# EAGLE board adc (EAGLE 5.07)
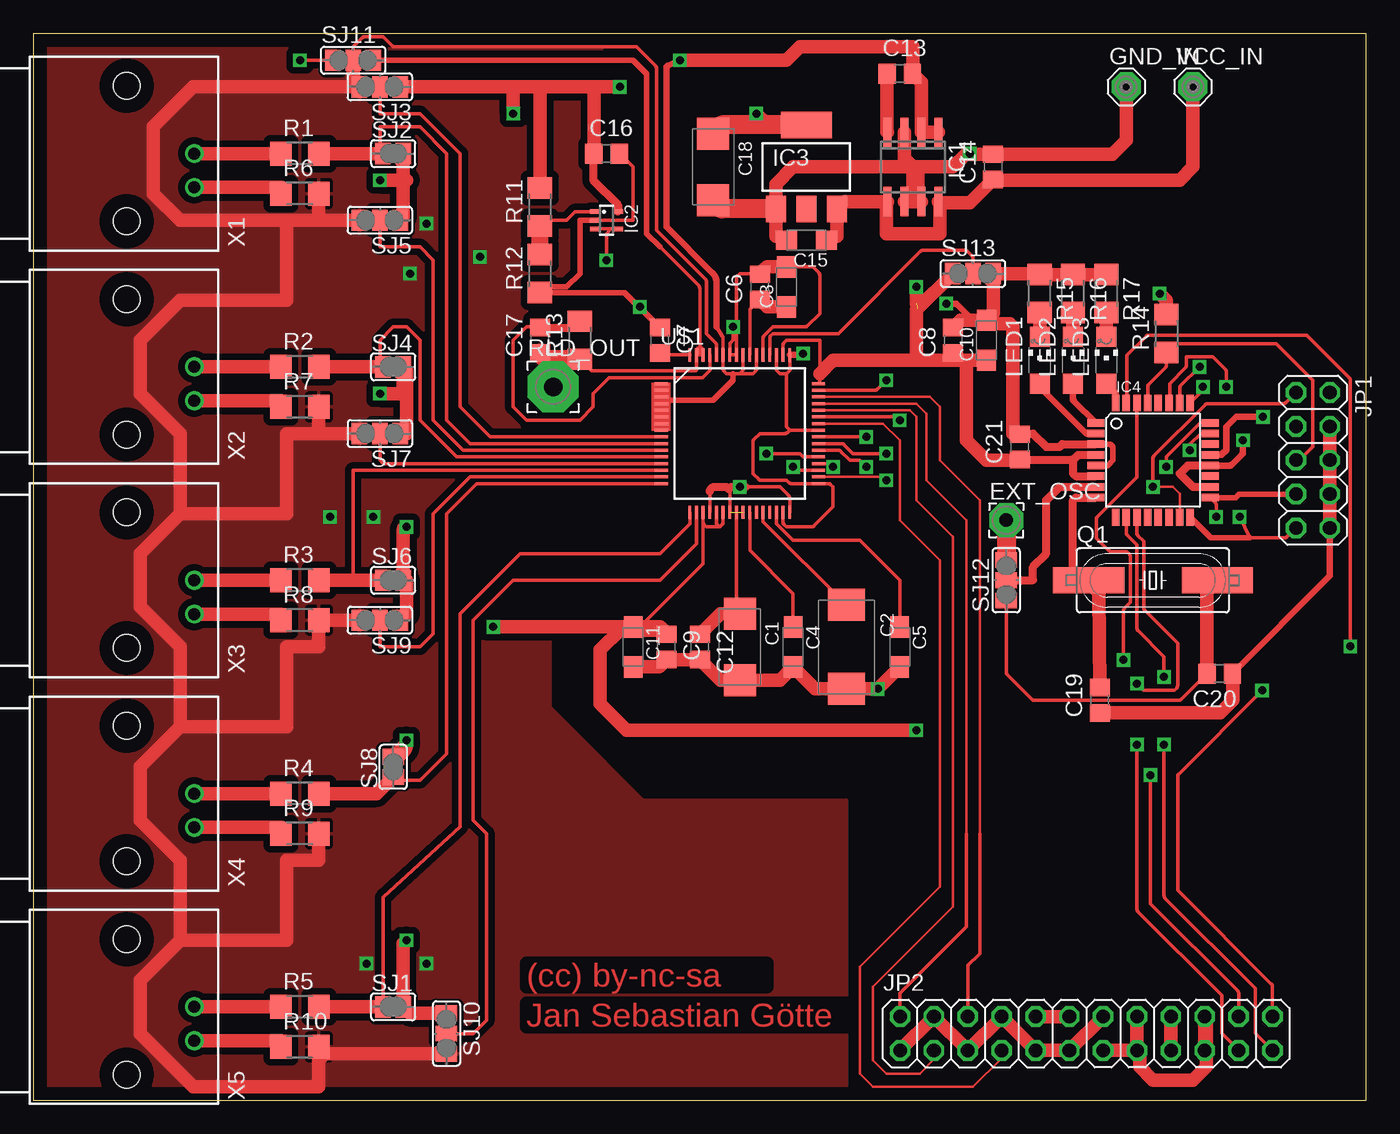
[diagram p0: board, top side]
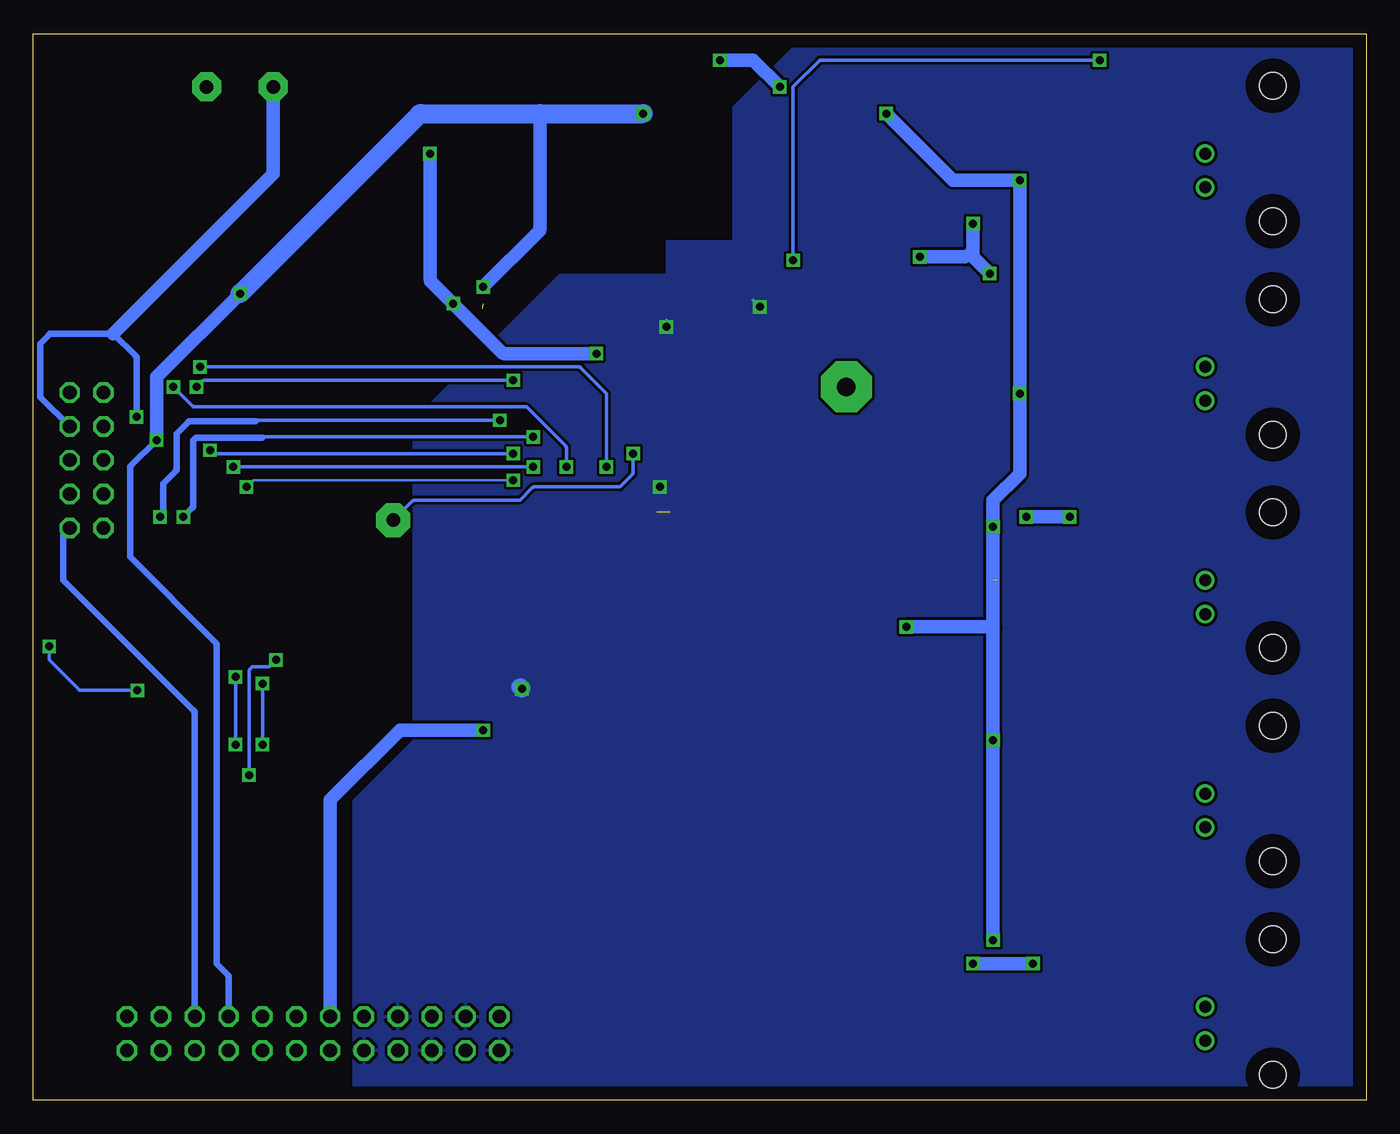
[diagram p1: board, bottom side, seen from below]

Size 100 x 80 mm. Coordinates in mm from the lower left corner, seen from the top.
Outline: 0,0 100,0 100,80 0,80 0,0
Copper layers (1*16): Top 0.035mm / dielectric 1.5mm / Bottom 0.035mm
Design rules "default": minimum track width 10mil, minimum drill 24mil, track to track 8mil, track to pad 8mil, pad to pad 8mil, via to via 8mil, smd to smd 8mil, copper to edge 40mil, drill to drill 8mil, minimum pad ring 10mil, minimum via ring 8mil, stop-mask expansion 4mil, vias tented up to drill 0mil, thermal gap 10mil

## Footprints (pad centres in the part's own frame; a part is rotated, then mirrored left to right if it is on the bottom)
SMC_C = smd 2.4 x 2.4: + -2.5,0; - 2.5,0
SMC_D = smd 2.4 x 2.8: + -3.15,0; - 3.15,0
SMC_A = smd 1.6 x 1.4: + -1.5,0; - 1.5,0
C0805 = smd 1.3 x 1.5: 1 -0.95,0; 2 0.95,0
2,54/1,0 = drill 1.016 pad 2.54 octagon: 1 0,0
MCS10B = drill 1.016 pad 2.159 octagon: MP 0,0
SOIC8 = smd 0.6 x 2.2: 1 -1.905,-2.6; 2 -0.635,-2.6; 3 0.635,-2.6; 4 1.905,-2.6; 5 1.905,2.6; 6 0.635,2.6; 7 -0.635,2.6; 8 -1.905,2.6
SC70-5L = smd 0.35 x 0.8: 1 -0.65,-0.85; 2 0,-0.85; 3 0.65,-0.85; 4 0.65,0.85; 5 -0.65,0.85
SOT223 = smd 1.5 x 2: 1 -2.3,-3.15; 2 0,-3.15; 3 2.3,-3.15 | smd 3.8 x 2: 4 0,3.15
TQFP32-08 = smd 1.27 x 0.559: 1 -4.293,2.8; 2 -4.293,2; 3 -4.293,1.2; 4 -4.293,0.4; 5 -4.293,-0.4; 6 -4.293,-1.2; 7 -4.293,-2; 8 -4.293,-2.8; 17 4.293,-2.8; 18 4.293,-2; 19 4.293,-1.2; 20 4.293,-0.4; 21 4.293,0.4; 22 4.293,1.2; 23 4.293,2; 24 4.293,2.8 | smd 0.559 x 1.27: 9 -2.8,-4.293; 10 -2,-4.293; 11 -1.2,-4.293; 12 -0.4,-4.293; 13 0.4,-4.293; 14 1.2,-4.293; 15 2,-4.293; 16 2.8,-4.293; 25 2.8,4.293; 26 2,4.293; 27 1.2,4.293; 28 0.4,4.293; 29 -0.4,4.293; 30 -1.2,4.293; 31 -2,4.293; 32 -2.8,4.293
2X05 = drill 1.016 octagon: 1 -5.08,-1.27; 2 -5.08,1.27; 3 -2.54,-1.27; 4 -2.54,1.27; 5 0,-1.27; 6 0,1.27; 7 2.54,-1.27; 8 2.54,1.27; 9 5.08,-1.27; 10 5.08,1.27
2X12 = drill 1.016 octagon: 1 -13.97,-1.27; 2 -13.97,1.27; 3 -11.43,-1.27; 4 -11.43,1.27; 5 -8.89,-1.27; 6 -8.89,1.27; 7 -6.35,-1.27; 8 -6.35,1.27; 9 -3.81,-1.27; 10 -3.81,1.27; 11 -1.27,-1.27; 12 -1.27,1.27; 13 1.27,-1.27; 14 1.27,1.27; 15 3.81,-1.27; 16 3.81,1.27; 17 6.35,-1.27; 18 6.35,1.27; 19 8.89,-1.27; 20 8.89,1.27; 21 11.43,-1.27; 22 11.43,1.27; 23 13.97,-1.27; 24 13.97,1.27
CHIPLED_1206 = smd 1.5 x 1.5: A 0,-1.75; C 0,1.75
HC49UP = smd 5.334 x 1.93: 1 -4.826,0; 2 4.826,0
R1206 = smd 1.6 x 1.803: 1 -1.422,0; 2 1.422,0
3,81/1,4 = drill 1.397 pad 3.81 octagon: 1 0,0
SJ = smd 1.168 x 1.6: 1 -0.762,0; 2 0.762,0
SJ_2 = smd 1.168 x 1.6: 1 -1.524,0; 2 0,0; 3 1.524,0
TQFP-64 = smd 1 x 0.22: 1 -5.9,3.75; 2 -5.9,3.25; 3 -5.9,2.75; 4 -5.9,2.25; 5 -5.9,1.75; 6 -5.9,1.25; 7 -5.9,0.75; 8 -5.9,0.25; 9 -5.9,-0.25; 10 -5.9,-0.75; 11 -5.9,-1.25; 12 -5.9,-1.75; 13 -5.9,-2.25; 14 -5.9,-2.75; 15 -5.9,-3.25; 16 -5.9,-3.75; 33 5.9,-3.75; 34 5.9,-3.25; 35 5.9,-2.75; 36 5.9,-2.25; 37 5.9,-1.75; 38 5.9,-1.25; 39 5.9,-0.75; 40 5.9,-0.25; 41 5.9,0.25; 42 5.9,0.75; 43 5.9,1.25; 44 5.9,1.75; 45 5.9,2.25; 46 5.9,2.75; 47 5.9,3.25; 48 5.9,3.75 | smd 0.22 x 1: 17 -3.75,-5.9; 18 -3.25,-5.9; 19 -2.75,-5.9; 20 -2.25,-5.9; 21 -1.75,-5.9; 22 -1.25,-5.9; 23 -0.75,-5.9; 24 -0.25,-5.9; 25 0.25,-5.9; 26 0.75,-5.9; 27 1.25,-5.9; 28 1.75,-5.9; 29 2.25,-5.9; 30 2.75,-5.9; 31 3.25,-5.9; 32 3.75,-5.9; 49 3.75,5.9; 50 3.25,5.9; 51 2.75,5.9; 52 2.25,5.9; 53 1.75,5.9; 54 1.25,5.9; 55 0.75,5.9; 56 0.25,5.9; 57 -0.25,5.9; 58 -0.75,5.9; 59 -1.25,5.9; 60 -1.75,5.9; 61 -2.25,5.9; 62 -2.75,5.9; 63 -3.25,5.9; 64 -3.75,5.9
AMP_227161 = drill 0.9 pad 1.27 round: 1 0,-5.08; 2 -2.54,-5.08 | hole 2: -5.08,0; 5.08,0

## Placement (x,y rotation side)
C1  10µ  [SMC_C]  53,34 270 top
C2  22µ  [SMC_D]  61,34 270 top
C3  1µ  [SMC_A]  56.5,61 90 top
C4  1µ  [SMC_A]  57,34 270 top
C5  1µ  [SMC_A]  65,34 270 top
C6  100n  [C0805]  54.5,61 90 top
C7  100p  [C0805]  47,57 270 top
C8  100n  [C0805]  69,57 90 top
C9  100n  [C0805]  47.5,34 270 top
C10  1µ  [SMC_A]  71.5,57 90 top
C11  1µ  [SMC_A]  45,34 270 top
C12  100n  [C0805]  50,34 270 top
C13  10n  [C0805]  65,77 0 top
C14  100n  [C0805]  72,70 90 top
C15  1µ  [SMC_A]  58,64.5 180 top
C16  100n  [C0805]  43,71 0 top
C17  10n  [C0805]  38,57 90 top
C18  10µ  [SMC_C]  51,70 270 top
C19  22p  [C0805]  80,30 90 top
C20  22p  [C0805]  89,32 180 top
C21  100n  [C0805]  74,49 90 top
EXT_OSC  [2,54/1,0]  73,43.5 0 top
GND_IN  MCS10B  [MCS10B]  82,76 0 top
IC1  LT1763CS8-5  [SOIC8]  66,70 180 top
IC2  LMV321M7  [SC70-5L]  43,66 270 top
IC3  LD117AS33TR  [SOT223]  58,70 0 top
IC4  MEGA8L  [TQFP32-08]  84,48 0 top
JP1  [2X05]  96,48 270 top
JP2  [2X12]  79,5 0 top
LED1  red  [CHIPLED_1206]  75.5,55.5 0 top
LED2  green  [CHIPLED_1206]  78,55.5 0 top
LED3  green  [CHIPLED_1206]  80.5,55.5 0 top
Q1  16MHz  [HC49UP]  84,39 0 top
R1  100k  [R1206]  20,71 0 top
R2  100k  [R1206]  20,55 0 top
R3  100k  [R1206]  20,39 0 top
R4  100k  [R1206]  20,23 0 top
R5  100k  [R1206]  20,7 0 top
R6  100k  [R1206]  20,68 0 top
R7  100k  [R1206]  20,52 0 top
R8  100k  [R1206]  20,36 0 top
R9  100k  [R1206]  20,20 0 top
R10  100k  [R1206]  20,4 0 top
R11  20k  [R1206]  38,67 90 top
R12  20k  [R1206]  38,62 90 top
R13  390k  [R1206]  41,57 90 top
R14  100k  [R1206]  85,57.5 90 top
R15  160  [R1206]  75.5,60.5 270 top
R16  120  [R1206]  78,60.5 270 top
R17  120  [R1206]  80.5,60.5 270 top
RLD_OUT  [3,81/1,4]  39,53.5 0 top
SJ1  [SJ]  27,7 0 top
SJ2  [SJ]  27,71 0 top
SJ3  [SJ_2]  26,76 180 top
SJ4  [SJ]  27,55 0 top
SJ5  [SJ_2]  26,66 180 top
SJ6  [SJ]  27,39 0 top
SJ7  [SJ_2]  26,50 180 top
SJ8  [SJ]  27,25 90 top
SJ9  [SJ_2]  26,36 180 top
SJ10  [SJ_2]  31,5 270 top
SJ11  [SJ_2]  24,78 0 top
SJ12  [SJ_2]  73,39 90 top
SJ13  [SJ_2]  70.5,62 0 top
U$1  ADS1194  [TQFP-64]  53,50 0 top
VCC_IN  MCS10B  [MCS10B]  87,76 0 top
X1  1-227161-0  [AMP_227161]  7,71 90 top
X2  1-227161-0  [AMP_227161]  7,55 90 top
X3  1-227161-0  [AMP_227161]  7,39 90 top
X4  1-227161-0  [AMP_227161]  7,23 90 top
X5  1-227161-0  [AMP_227161]  7,7 90 top

## Library data of the parts
C1-C21 R1-R17 = rcl
EXT_OSC RLD_OUT = wirepad
GND_IN VCC_IN = solpad
IC1 = linear-technology
IC2 = linear
IC3 = v-reg
IC4 = atmel
JP1 JP2 = pinhead
LED1-LED3 = led
Q1 = crystal
SJ1-SJ13 = jumper
U$1 = mytexas
X1-X5 = con-coax

## Nets
!DRDY: IC4.25 U$1.47
!PWDN: IC4.26 U$1.35
!RESET: IC4.27 U$1.36
CS1: IC4.23 U$1.39
GND: C8.2 C10.- C14.2 C15.- C18.- C19.1 C20.1 C21.2 GND_IN.MP IC1.3 IC1.6 IC1.7 IC3.1 IC4.3 IC4.5 IC4.21 JP1.4 JP1.6 JP1.8 JP1.10 JP2.13 JP2.15 JP2.16 JP2.19 JP2.20 R15.1 R16.1 R17.1 SJ13.3 U$1.31 U$1.33 U$1.41 U$1.49 U$1.51
MISO: IC4.16 JP1.9 U$1.43
MOSI: IC4.15 JP1.1 U$1.34
N$1: C2.+ U$1.28
N$2: C4.+ U$1.26
N$3: C7.2 U$1.64
N$4: C5.+ U$1.30
N$5: C3.+ C6.1 U$1.55
N$6: C1.+ C12.1 U$1.24
N$7: IC2.1 R11.1 R12.2
N$8: R1.2 SJ2.1 U$1.10
N$10: R2.2 SJ4.1 U$1.12
N$11: C14.1 C15.+ IC1.5 IC1.8 IC3.3 VCC_IN.MP
N$12: R3.2 SJ6.1 U$1.14
N$13: R6.2 R7.2 R8.2 R9.2 R10.2 SJ3.3 SJ5.3 SJ7.3 SJ9.3 SJ10.3 SJ11.2 U$1.60
N$14: R4.2 SJ8.1 U$1.16
N$15: R5.2 SJ1.1 U$1.17
N$16: C13.1 IC1.4
N$17: R1.1 X1.1
N$18: R2.1 X2.1
N$19: R3.1 X3.1
N$20: R4.1 X4.1
N$21: R5.1 X5.1
N$22: SJ10.2 U$1.18
N$23: SJ9.2 U$1.15
N$24: SJ7.2 U$1.13
N$25: SJ5.2 U$1.11
N$26: SJ3.2 U$1.9
N$27: R10.1 X5.2
N$28: R9.1 X4.2
N$29: R8.1 X3.2
N$30: R7.1 X2.2
N$31: R6.1 X1.2
N$32: IC2.3 IC2.4 SJ11.1
N$33: C17.1 R13.1 RLD_OUT.1 SJ11.3 U$1.62 U$1.63
N$34: C17.2 R13.2 U$1.61
N$35: C20.2 Q1.2 SJ12.1
N$36: EXT_OSC.1 SJ12.3 U$1.37
N$37: IC4.29 JP1.5 R14.1
N$38: C19.2 IC4.8 Q1.1
N$39: SJ13.2 U$1.52
N$40: IC4.7 SJ12.2
N$41: IC4.32 LED3.A
N$42: IC4.1 LED2.A
N$43: IC4.2 LED1.A
N$44: LED1.C R15.2
N$45: LED2.C R16.2
N$46: LED3.C R17.2
N$48: JP2.2 U$1.45
N$49: JP2.7 U$1.42
N$50: C9.1 C11.+ C13.2 C16.1 IC1.1 IC1.2 IC2.5 JP2.10 JP2.12 R11.2 SJ1.2 SJ2.2 SJ3.1 SJ4.2 SJ5.1 SJ6.2 SJ7.1 SJ8.2 SJ9.1 SJ10.1 U$1.19 U$1.21 U$1.22 U$1.54 U$1.56 U$1.59
N$51: JP2.6 U$1.46
N$52: JP2.3 U$1.44
N$53: C8.1 C10.+ C18.+ C21.1 IC3.4 IC4.4 IC4.6 IC4.18 IC4.20 JP2.17 JP2.18 R14.2 SJ13.1 U$1.48 U$1.50
PD0: IC4.30 JP2.22
PD1: IC4.31 JP2.24
PD6: IC4.10 JP2.23
PD7: IC4.11 JP2.21
SCLK: IC4.17 JP1.7 U$1.40
START: IC4.24 U$1.38
VSS: C1.- C2.- C3.- C4.- C5.- C6.2 C7.1 C9.2 C11.- C12.2 C16.2 IC2.2 JP2.1 JP2.4 JP2.5 JP2.8 JP2.9 JP2.11 JP2.14 R12.1 U$1.20 U$1.23 U$1.25 U$1.32 U$1.53 U$1.57 U$1.58

## Tracks (layer width: path | path; a pad name or v marks a point on that pad's centre or on a via)
!DRDY  (via drill 0.6)
  Top 0.254: U$1.47 63.15,53.25 arc45 63.32,53.32 v64,54 | v87.75,53.5 87.75,53.35 arc-45 87.68,53.17 IC4.25
  Bottom 0.254: v64,54 87.14,54 arc-45 87.32,53.93 v87.75,53.5
!PWDN  (via drill 0.6)
  Top 0.254: 86,52.25 IC4.26 86,53.4 arc-45 86.07,53.57 v87.5,55 | v57,47.5 57.18,47.32 arc45 57.35,47.25 U$1.35
  Bottom 0.254: v87.5,55 59.1,55 arc45 58.93,54.93 57,53 v57,47.5
!RESET  (via drill 0.6)
  Top 0.254: U$1.36 59.65,47.75 arc-45 59.82,47.68 v60,47.5 | v89.5,53.5 89.5,54.65 arc45 89.43,54.82 88.5,55.75 86.5,55.75 86.5,55.1 arc-45 86.43,54.93 85.25,53.75 85.25,52.41 arc-45 IC4.27
  Bottom 0.254: v60,47.5 60,48.9 arc-45 60.07,49.07 63,52 87.89,52 arc45 88.07,52.07 v89.5,53.5
CS1  (via drill 0.6)
  Top 0.254: U$1.39 60.65,49.25 arc-45 60.82,49.18 61.5,48.5 v64,48.5 | IC4.23 87.61,50 86.82,49.22 arc45 86.75,49.04 v86.75,48.75
  Bottom 0.254: v86.75,48.75 86.57,48.57 arc-45 86.39,48.5 v64,48.5
GND  (via drill 0.6)
  Top 0.254: U$1.49 56.75,54.75 56.5,54.5 | U$1.51 55.75,54.75 56,54.5 56.5,54.5 | 56.75,50.25 U$1.41 56.85,50.25 | 56.75,50.25 56.5,50.5 56.5,54.5 | 88,3.5 88,2.5 87.07,1.57 arc-45 86.89,1.5 84,1.5 82.88,2.62 arc-45 82.81,2.79 JP2.15 | U$1.31 56.25,43.35 arc45 56.32,43.18 56.5,43 58.4,43 arc45 58.57,43.07 60,44.5 60,46 59.82,46.18 arc45 59.65,46.25 U$1.33 56.85,46.25 arc-45 56.68,46.32 56.5,46.5 54.6,46.5 arc-45 54.43,46.57 54,47 54,49.4 arc-45 54.07,49.57 54.5,50 56.4,50 arc45 56.57,50.07 56.75,50.25
  Top 0.406: IC4.3 80.8,49.2 81,49 81,48 80.6,47.6 IC4.5
  Top 0.5: U$1.49 57.55,55.9 arc45 57.72,55.97 v57.75,56 | v68.5,59.75 69.14,59.75 arc-45 69.32,59.68 70.5,58.5 | IC1.7 66.64,69.53 arc-45 66.71,69.71 67,70 69.14,70 arc45 69.32,70.07 v70.25,71 | IC4.21 89.05,48.4 arc45 89.22,48.47 89.5,48.75 89.5,50.4 arc-45 89.57,50.57 90.25,51.25 v92.25,51.25 | JP1.10 97.27,39.42 arc-45 97.2,39.25 C20.1
  Top 0.61: IC4.3 77.2,49.2 77,49 76,49 75,50 74.05,50 C21.2
  Top 1.016: C15.- 55.7,64.8 IC3.1 55.7,68.7 57,70 66,70 | 66,67.4 IC1.6 | 66,67.4 IC1.7 | GND_IN.MP 82,72 80.95,70.95 C14.2 69.95,70.95 69,70 67,70 66,70 | 66,70 66,67.4 | IC1.3 65.36,70.64 66,70 | JP1.10 JP1.8 JP1.6 JP1.4 | JP2.13 JP2.15 JP2.16 | JP2.19 JP2.20 87.93,6.23 arc-45 88,6.05 88,3.5 | C20.1 arc-45 90,31.88 90,30 89.12,29.12 arc-45 88.94,29.05 C19.1 | R17.1 R16.1 R15.1 R15.1 arc45 75.32,62 SJ13.3 72.02,59.13 arc-45 71.95,58.95 C10.- | C10.- 70.5,58.5 69.66,58.5 arc45 69.48,58.43 C8.2 | C10.- 71.68,58.32 arc45 71.86,58.25 73.25,58.25 73.43,58.07 arc-45 73.5,57.9 73.5,50 arc45 73.62,49.95 C21.2
  Top 1.422: C18.- 51.65,66.85 IC3.1
  Bottom 0.5: 64.82,56.07 arc-45 64.64,56 | 70.25,61.6 arc-45 70.18,61.43 | v92.25,51.25 92.25,55.65 arc-45 92.32,55.82 94,57.5 98.64,57.5 arc-45 98.82,57.43 99.5,56.75 99.5,52.88 arc-45 99.43,52.7 JP1.4 | JP2.20 87.89,29.04 arc-45 87.96,29.21 97.75,39 97.75,42.34 arc45 97.68,42.51 JP1.10
  Bottom 1.016: 64.64,56 v57.75,56 | 64.82,56.07 v68.5,59.75 70.18,61.43 | v70.25,71 70.25,61.6 | 94,57.5 82.07,69.43 arc-45 82,69.61 GND_IN.MP
MISO  (via drill 0.6)
  Top 0.254: U$1.43 64.64,51.25 arc-45 64.82,51.18 v65,51 | v90.5,43.75 91.25,42.17 93.88,42.17 arc45 94.05,42.24 JP1.9
  Top 0.406: 91.25,42.17 88.34,42.17 IC4.16
  Bottom 0.254: v65,51 83.14,51 arc-45 83.32,50.93
  Bottom 0.5: 83.32,50.93 88.22,50.93 arc-45 88.4,50.85 89.25,50 89.25,47.35 arc45 89.32,47.18 90.25,46.25 90.25,44.1 arc45 90.32,43.93 v90.5,43.75
MOSI  (via drill 0.6)
  Top 0.2: U$1.34 63.75,46.75 v64,46.5 | v84,46 85.5,46 86,45.5 IC4.15
  Top 0.254: JP1.1 93.97,52.32 arc-45 93.8,52.25 88.11,52.25 arc45 87.93,52.18 84.07,48.32 arc45 84,48.15 v84,46
  Bottom 0.2: v64,46.5 83.39,46.5 arc-45 83.57,46.43 v84,46
N$1
  Top 0.254: U$1.28 54.75,43.4 C2.+
N$2
  Top 0.254: U$1.26 53.75,41.25 57,38 C4.+
N$3
  Top 0.254: C7.2 47.15,55.9 U$1.64
N$4
  Top 0.254: U$1.30 55.75,43.25 57,42 62,42 65,39 C5.+
N$5
  Top 0.254: U$1.55 53.75,59.2 arc-45 53.82,59.37 C6.1
  Top 1.016: C3.+ 55.16,59.5 arc-45 54.98,59.57 C6.1
N$6
  Top 0.254: U$1.24 52.75,36.5 C1.+
  Top 1.016: C12.1 51.55,36.5 C1.+
N$7
  Top 0.254: IC2.1 40.65,66.65 40,66 38.42,66 R11.1
  Top 1.27: R12.2 R11.1
N$8
  Top 0.254: SJ2.1 26,71.24 26,73 29,73 31,71 31,51 32.75,49.25 U$1.10
  Top 1.016: SJ2.1 R1.2
N$9
  Top 0.254: 43,65 43,64
N$10
  Top 0.254: U$1.12 31.75,48.25 29,51 29,57 28,58 27,58 26,57 26,55
  Top 1.016: R2.2 26,55 SJ4.1
N$11
  Top 1.016: C15.+ 60.3,64.8 IC3.3 60.85,67.4 IC1.5 64,67.4 64,65 68,65 68,67.31 | VCC_IN.MP 87,70 86,69 72.05,69 C14.1 70.25,67.31 68,67.31 | 68,67.31 IC1.8
N$12
  Top 0.254: U$1.14 24,47.25 24,39
  Top 1.016: R3.2 24,39 SJ6.1
N$13  (via drill 0.6)
  Top 0.254: U$1.60 51.25,56.65 arc45 51.18,56.82 50.5,57.5 50.5,61.4 arc45 50.43,61.57 46.75,65.25 46.75,77.39 arc45 46.68,77.57 45.25,79 27.11,79 arc-45 26.93,79.07 26.25,79.75 24.86,79.75 arc45 24.68,79.68 24.07,79.07 arc45 24,78.89 SJ11.2
  Top 1.016: 21.42,3 21.42,1 12,1 8,5 8,9 11,12 | 21.42,3 R10.2 | 11,12 19,12 19,18 21.42,18 R9.2 | 11,12 11,18 8,21 8,25 11,28 | 11,28 11,34 8,37 8,41 11,44 | 11,44 11,50 8,53 8,57 11,60 19,60 19,66 | 11,28 19,28 19,34 21.42,34 R8.2 SJ9.3 | 11,44 19,44 19,50 21.42,50 | 21.42,50 R7.2 | 21.42,66 R6.2 | 19,66 21.42,66 | 21.42,66 SJ5.3 | 21.42,50 SJ7.3 | SJ10.3 21.9,3.48 21.42,3 | 19,66 11,66 9,68 9,73 12,76 SJ3.3 24,76.48 SJ11.2
  Bottom 0.5: 29.43,63.18 arc45 29.5,63.35 | 29.75,63.5 29.93,63.32 arc45 30.11,63.25
  Bottom 1.016: v28.25,62 29.43,63.18 | v29.5,65.75 29.5,63.35 29.57,63.43 arc-45 29.75,63.5 | 30.11,63.25 v33.5,63.25 | v25,10.25 v29.5,10.25 | v22.25,43.75 v25.5,43.75
  pour Top (isolate 0.5): 0.25,80 0.07,79.82 arc45 0,79.64 0,0 61,0 61,22.5 45.75,22.5 38.82,29.43 arc-45 38.75,29.61 38.75,37.25 48.75,37.25 51.43,39.93 arc45 51.5,40.11 51.5,43.75 59,43.75 59,56.5 58.82,56.32 arc-45 58.64,56.25 48.5,56.25 48.32,56.43 arc-45 48.25,56.61 48.25,73.25 41.57,79.93 arc45 41.39,80
N$14
  Top 0.254: U$1.16 33.25,46.25 31,44 31,26 29,24 27.24,24 SJ8.1
  Top 1.016: R4.2 25.76,23 SJ8.1
N$15
  Top 0.254: SJ1.1 26.24,15.24 32,20.5 32,36.5 36.5,41 47,41 49.25,43.25 U$1.17
  Top 1.016: R5.2 SJ1.1
N$16
  Top 1.016: C13.1 64.05,72.64 IC1.4
N$17
  Top 1.016: X1.1 R1.1
N$18
  Top 1.016: X2.1 R2.1
N$19
  Top 1.016: X3.1 R3.1
N$20
  Top 1.016: X4.1 R4.1
N$21
  Top 1.016: X5.1 R5.1
N$22
  Top 0.254: SJ10.2 33,5 34,6 34,20 33,21 33,36 36,39 47,39 49.75,41.75 U$1.18
N$23
  Top 0.254: U$1.15 32.75,46.75 30,44 30,35 29,34 26,34 SJ9.2
N$24
  Top 0.254: U$1.13 26.25,47.75 26,48 SJ7.2
N$25
  Top 0.254: U$1.11 32.25,48.75 30,51 30,63 29,64 26,64 SJ5.2
N$26
  Top 0.254: SJ3.2 26,74 29,74 32,71 32,52 34.25,49.75 U$1.9
N$27
  Top 1.016: X5.2 18.58,4.46 R10.1
N$28
  Top 1.016: X4.2 18.58,20.46 R9.1
N$29
  Top 1.016: X3.2 18.58,36.46 R8.1
N$30
  Top 1.016: X2.2 18.58,52.46 R7.1
N$31
  Top 1.016: X1.2 18.58,68.46 R6.1
N$32  (via drill 0.6)
  Top 0.254: IC2.3 IC2.4 43.35,65.35 43,65 v43,63 | v20,78 SJ11.1
  Bottom 0.254: v20,78 41,78 43,76 v43,63
N$33
  Top 0.254: U$1.63 U$1.62 | U$1.63 49.9,55.9 50,56 50,60.9 arc45 49.93,61.07 47,64 | 41.08,55.5 R13.1 41.88,54.7 49.7,54.7 49.75,54.75 U$1.63
  Top 0.406: SJ11.3 45,78 46,77 46,65 47,64
  Top 0.61: 38.47,55.58 39,55.05 RLD_OUT.1
  Top 1.422: C17.1 38.47,55.58 R13.1
N$34
  Top 0.254: U$1.61 50.75,54.75 50.2,54.2 43.2,54.2 42,53 42,52 41,51 37,51 36,52 36,57 37,58 37.95,58 C17.2
  Top 0.61: R13.2 40.53,57.95 C17.2
N$35
  Top 0.254: SJ12.1 73,32.1 arc45 73.07,31.93 75,30 85.94,30 arc45 86.12,30.07 C20.2
  Top 1.016: Q1.2 88.12,38.3 arc45 88.05,38.12 C20.2
N$36  (via drill 0.6)
  Top 0.254: U$1.37 57.85,48.25 arc-45 57.68,48.32 57.5,48.5 v55,48.5
  Top 1.422: SJ12.3 73.02,42.5 EXT_OSC.1
  Bottom 0.254: v55,48.5 55,47.1 arc45 55.07,46.93 56,46 62.4,46 arc-45 62.57,45.93 63.5,45 71.39,45 arc-45 71.57,44.93 EXT_OSC.1
N$37
  Top 0.254: JP1.5 94.89,48 arc45 95.07,48.07 96,49 96,54 93.25,56.75 85.78,56.75 arc45 85.6,56.68 R14.1 85,55.1 arc-45 84.93,54.93 83.67,53.67 arc45 83.6,53.49 IC4.29
N$38
  Top 0.61: IC4.8 78.2,45.2 78,45 78,39 Q1.1
  Top 1.016: C19.2 79.95,38.05 79,39 Q1.1
N$39
  Top 0.254: U$1.52 55.25,57.15 arc-45 55.32,57.32 55.5,57.5 60.4,57.5 66.57,63.68 arc-45 66.75,63.75 70,63.75 70.43,63.32 arc-45 70.5,63.15 SJ13.2
N$40
  Top 0.61: SJ12.2 75,39 75,40 76,41 76,45 77,46 IC4.7
N$41
  Top 0.5: IC4.32 81.2,52.95 arc45 81.13,53.12 LED3.A
N$42
  Top 0.5: LED2.A 78,52.61 arc45 78.07,52.43 IC4.1
N$43
  Top 0.5: IC4.2 79.11,50 arc-45 78.93,50.07 75.57,53.43 arc-45 75.5,53.6 LED1.A
N$44
  Top 1.016: LED1.C R15.2
N$45
  Top 1.016: LED2.C R16.2
N$46
  Top 1.016: LED3.C R17.2
N$47
  Top 1.016: 83,3.5 83,2.5 83.93,1.57 arc45 84.11,1.5 87,1.5 87.93,2.43 arc45 88,2.6 88,4
N$48
  Top 0.2: 70,20 70,43.5 67,46.5 67,51.5 66.25,52.25 U$1.45
  Top 0.254: JP2.2 65.03,8.03 70,13 70,20
N$49
  Top 0.2: JP2.7 72.65,3.15 70.5,1 63,1 62,2 62,10 68,16 68,40.5 65,43.5 65,49.5 63.75,50.75 U$1.42
N$50  (via drill 0.6)  (1 unrouted)
  Top 0.254: 45.5,35.5 50.18,40.18 arc45 50.25,40.35 U$1.19 50.25,43.35 arc45 50.32,43.18 50.5,43 51.4,43 arc45 51.57,43.07 | U$1.22 51.75,43.35 arc-45 51.68,43.18 51.57,43.07 | 51.57,43.07 51.5,43 51.32,43.18 arc-45 51.25,43.35 U$1.21 | 51.75,54.85 arc45 51.82,54.68 | U$1.56 53.25,54.85 arc-45 53.18,54.68 53,54.5 | 53,54.5 52.5,54.5 52,54.5 51.82,54.68 | 51.75,54.85 U$1.59 51.75,57.15 arc45 51.68,57.32 51.25,58 | 51.75,54.85 arc45 51.82,54.68 | 53,54.5 54,54.5 54.18,54.68 arc45 54.25,54.85 U$1.54
  Top 0.406: 47.5,52.5 51,52.5 52.43,53.93 arc45 52.5,54.1 52.5,54.5
  Top 0.5: 51.25,58 51.25,61.4 arc45 50.93,62.07 47.5,65.5 47.5,77.39 arc-45 47.57,77.57 v48.5,78
  Top 0.61: IC2.5 43.85,67.15 42,69 42,71.95 42.05,72
  Top 1.016: SJ10.1 28.24,6.52 SJ1.2 27.76,11.76 v28,12 | SJ9.1 28,36.48 28,39 | 28,53 28,50 SJ7.1 | 28,53 28,54.76 SJ4.2 27.76,53.24 28,53 | SJ5.1 27.76,66.24 27.76,69 | 27.76,69 SJ2.2 27.76,69.24 28,69 v26,69 27.76,69 | 36,76 SJ3.1 | 36,76 38,76 | 38,76 42.05,76 | 42.05,76 42.05,72 C16.1 | 38,76 R11.2 | 28,26.76 SJ8.2 arc90 28,26.76 | v28,27 28,26.76 | v28,43 arc90 27.76,42.76 SJ6.2 | v26,53 28,53 | v36,74 36,76 | IC1.2 IC1.1 | IC1.2 66.64,76.31 C13.2 | IC1.2 66.64,76.36 66,77 66,79 57.5,79 56.57,78.07 arc-45 56.4,78 v48.5,78 | 42.05,76 v44,76 | C9.1 46.95,35.5 45.5,35.5 C11.+ | JP2.12 JP2.10 | C9.1 arc45 47.47,35.03 47,35.5 v34.5,35.5 | C9.1 47.27,35.18 arc45 47.09,35.25 44,35.25 42.57,33.82 arc45 42.5,33.65 42.5,29.75 44.43,27.82 arc45 44.6,27.75 v66.25,27.75
  Bottom 1.016: v28,12 v28,27 28,35.5 | 28,35.5 v28,43 28,45 26,47 v26,53 v26,69 31,69 v36,74 | v48.5,78 46,78 v44,76 | 28,35.5 v34.5,35.5 | v66.25,27.75 72.5,27.75 77.66,22.59 arc-45 77.73,22.41 JP2.12
N$51
  Top 0.2: 71,20 71,45 68,48 68,52 67.25,52.75 U$1.46
  Top 0.254: JP2.6 70.11,10.11 71,11 71,20
N$52
  Top 0.2: JP2.3 67.57,3.07 66.5,2 64,2 63,3 63,8.5 69,14.5 69,42.25 66.25,45 66.25,51.25 65.75,51.75 U$1.44
N$53  (via drill 0.6)  (1 unrouted)
  Top 0.254: U$1.50 56.25,56.65 arc-45 56.32,56.82 56.5,57 59,57 59,54.5 59,53.95 arc-45 58.93,53.78 U$1.48
  Top 0.5: v90.75,49.5 90.75,48.6 arc-45 90.68,48.43 89.92,47.67 arc-45 89.75,47.6 IC4.20
  Top 0.61: IC4.20 86.6,47.6 86,47 87,46 IC4.18 | IC4.6 78.2,46.8 78,47 78,48 | IC4.4 78.4,48.4 78,48 | C21.1 77.95,48.05 78,48
  Top 1.016: v66.25,61 66.25,59.75 | JP2.17 JP2.18 | 69,55.5 70,55.5 | 70,55.5 C10.+ | 69,55.5 C8.1 | 66.25,55.5 60.1,55.5 arc45 59.93,55.43 59,54.5 | 66.25,55.5 69,55.5 | SJ13.1 66.32,59.35 arc45 66.25,59.17 66.25,55.5 | C21.1 arc-45 73.88,48 71.5,48 70.07,49.43 arc-45 70,49.6 70,55.5 | IC3.4 55.2,73.15 arc-45 55.03,73.22 v54.25,74 | R14.2 85,59.9 arc45 84.93,60.07 v84.5,60.5
  Top 1.422: IC3.4 51.65,73.15 C18.+
  Bottom 0.5: v90.75,49.5 92.68,47.57 arc-45 92.75,47.4 92.75,40.75 86.32,34.32 arc45 86.25,34.15 86.25,10.25 85.42,9.42 arc45 85.35,9.24 JP2.18
  Bottom 1.016: v84.5,60.5 90.68,54.32 arc-45 90.75,54.15 v90.75,49.5 | v66.25,61 62.07,65.18 arc-45 62,65.36 62,74
  Bottom 1.422: v54.25,74 62,74 70.89,74 arc-45 71.07,73.93 v84.5,60.5
PD0  (via drill 0.6)
  Top 0.254: JP2.22 90.43,8.02 arc45 90.36,8.2 83.82,14.73 v83.82,24.38 | v81.79,33.02 81.79,36.73 arc-45 81.86,36.9 82.3,37.34 82.3,40.79 arc45 82.22,40.97 82.04,41.15 80.88,41.15 arc-45 80.7,41.22 79.76,42.16 79.76,43.58 arc-45 79.83,43.76 82.73,46.66 arc45 82.8,46.84 IC4.30
  Bottom 0.254: v83.82,24.38 83.82,32.15 arc45 83.75,32.33 83.57,32.51 82.4,32.51 arc-45 82.22,32.59 v81.79,33.02
PD1  (via drill 0.6)
  Top 0.254: JP2.24 92.97,8.53 arc45 92.9,8.7 85.85,15.75 85.85,24.28 arc-45 85.93,24.46 v92.2,30.73 | v98.81,34.04 98.81,54 arc45 98.73,54.18 95.83,57.08 95.6,57.31 | 95.6,57.31 95.53,57.38 | IC4.31 arc45 82.04,52.39 82.04,55.86 83.49,57.31 arc-45 83.67,57.38 95.42,57.38 arc-45 95.6,57.31
  Bottom 0.254: v92.2,30.73 96.42,30.73 arc45 96.59,30.81 98.81,33.02 v98.81,34.04
PD6  (via drill 0.6)
  Top 0.254: JP2.23 91.77,4.93 arc-45 91.69,5.11 91.69,8.38 84.91,15.17 arc-45 84.84,15.35 v84.84,26.67 | v84.84,31.75 84.84,33.27 82.88,35.23 arc-45 82.8,35.41 82.8,41.66 82.07,42.39 arc-45 82,42.56 IC4.10
  Bottom 0.254: v84.84,26.67 v84.84,31.75
PD7  (via drill 0.6)
  Top 0.254: JP2.21 89.23,4.93 arc-45 89.15,5.11 89.15,7.87 82.88,14.15 arc-45 82.8,14.33 v82.8,26.67 | 82.8,43.7 arc45 IC4.11 82.8,42.53 arc45 82.87,42.35 83.31,41.91 83.31,36.94 arc45 83.39,36.76 85.85,34.29 85.85,31.09 arc-45 85.78,30.91 85.6,30.73 83.42,30.73 arc-45 83.24,30.81 v82.8,31.24
  Bottom 0.254: v82.8,26.67 v82.8,31.24
SCLK  (via drill 0.6)
  Top 0.254: U$1.40 v62.5,49.75 | v88.75,43.75 88.75,44.64 arc45 88.68,44.82 IC4.17
  Top 0.406: JP1.7 90.46,45.46 90.2,45.2 IC4.17
  Bottom 0.254: v62.5,49.75 82.64,49.75 arc-45 82.82,49.68
  Bottom 0.5: 82.82,49.68 87.72,49.68 arc-45 87.9,49.6 88,49.5 88,44.6 arc45 88.07,44.43 v88.75,43.75
START  (via drill 0.6)
  Top 0.254: U$1.38 60.4,48.75 arc-45 60.57,48.68 61.25,48 61.9,48 arc-45 62.07,47.93 v62.5,47.5 | IC4.24 87.66,50.8 arc45 87.48,50.73 85,48.25 v85,47.5
  Bottom 0.254: v62.5,47.5 84.5,47.5 v85,47.5
VSS  (via drill 0.6)  (1 unrouted)
  Top 0.254: C16.2 44,71 45,70 45,66 IC2.2 | U$1.20 50.75,45.65 | U$1.23 52.25,45.65 arc45 52.18,45.82 52.28,45.93 | 53.25,45.65 arc45 53.18,45.82 53.28,45.93 | U$1.53 54.75,57.15 arc-45 54.82,57.32 55.5,58 57.9,58 arc45 58.07,58.07 59,59 59,61.9 arc45 58.93,62.07 58.5,62.5 56,62.5 | C6.2 arc45 54.38,62 53,62 52.82,61.82 arc45 52.75,61.65 U$1.57 U$1.58 52.25,56.65 arc-45 52.32,56.82 52.5,57 v52.5,58 | C7.1 arc45 46.97,58.03 v45.5,59.5 | U$1.32 56.75,45.15 arc45 56.68,45.32 56,46 v53,46
  Top 0.406: IC2.2 41,66 41,62 40,61 38.42,61 R12.1 44.37,60.58 C7.1
  Top 0.61: 50.75,45.65 arc-45 50.82,45.82 51,46 52,46 52.18,45.82 | 53.18,45.82 v53,46 52.46,46 arc45 52.28,45.93 | 53.28,45.93 arc-45 53.46,46
  Top 1.016: JP2.1 JP2.4 JP2.5 JP2.8 JP2.9 JP2.11 JP2.14 | C5.- v63.35,30.85 C2.- 58.65,30.85 C4.- 56,31.5 C1.- 51.55,31.5 C12.2 C9.2 46.95,32.5 C11.- | C3.- 56,62.5 55.16,62.5 arc45 54.98,62.43 C6.2
  Bottom 0.254: v45.5,59.5 46,60 | v52.5,58 52.5,58.5
  Bottom 1.27: v63.35,30.85 arc-90 63.5,31
  pour Bottom (isolate 0.016): 0,80 0,0 76,0 76,22.5 71.5,27 71.5,51 60.5,62 52.5,62 52.5,64.5 47.5,64.5 47.5,74.5 42,80
(copper drawn outside any net)
  shapes: Top area x2

## Text on the board
Top: (cc) by-nc-sa | Jan Sebastian Götte